# EAGLE board AlphaNumeric-Display-Driver (EAGLE 5.04)
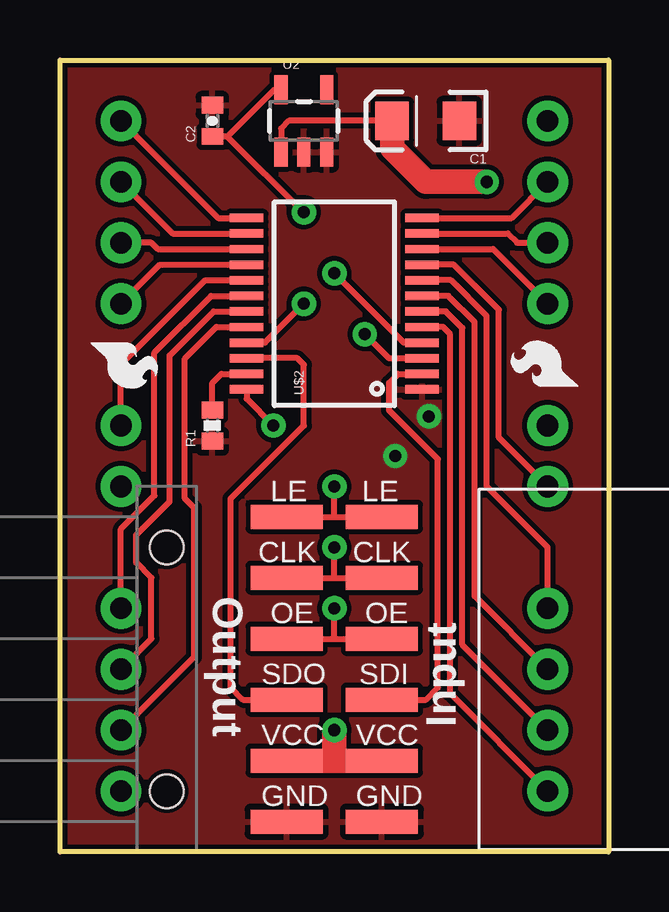
[diagram p0: board, top side]
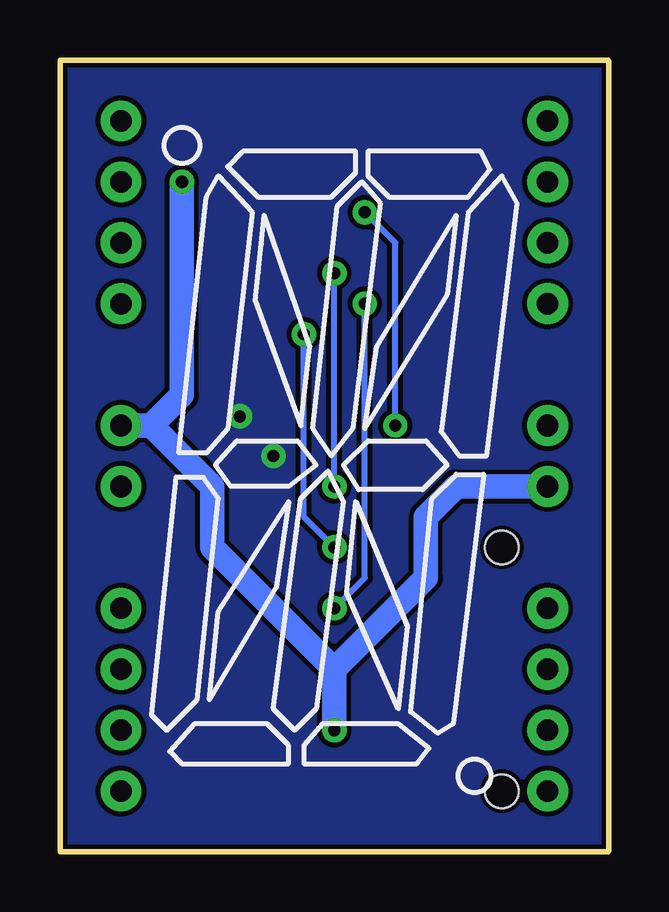
[diagram p1: board, bottom side, seen from below]

Size 22.86 x 33.02 mm. Coordinates in mm from the lower left corner, seen from the top.
Outline: 0,0 0,33.02 22.86,33.02 22.86,0 0,0
Copper layers (1*16): Top 0.035mm / dielectric 1.5mm / Bottom 0.035mm
Design rules "SparkFun": minimum track width 8mil, minimum drill 20mil, track to track 8mil, track to pad 8mil, pad to pad 8mil, via to via 8mil, smd to smd 8mil, copper to edge 8mil, drill to drill 8mil, minimum pad ring 12mil, minimum via ring 10mil, stop-mask expansion 4mil, vias tented up to drill 20mil, thermal gap 10mil

## Footprints (pad centres in the part's own frame; a part is rotated, then mirrored left to right if it is on the bottom)
EIA3216 = smd 1.4 x 1.6: A 1.4,0; C -1.4,0
0402-CAP = smd 0.7 x 0.9: 1 -0.65,0; 2 0.65,0
1X06-SMD = smd 1 x 3: 1 -6.35,5; 2 -3.81,5; 3 -1.27,5; 4 1.27,5; 5 3.81,5; 6 6.35,5 | hole 1.4: -5.08,0; 5.08,0
1X06-SMD-FEMALE-V2 = smd 1 x 3: 1 6.35,4.5; 2 3.81,4.5; 3 1.27,4.5; 4 -1.27,4.5; 5 -3.81,4.5; 6 -6.35,4.5
0402-RES = smd 0.7 x 0.9: 1 -0.65,0; 2 0.65,0
ALPHANUMERIC = drill 0.9 pad 1.7 round: 1 -8.89,13.97; 2 -8.89,11.43; 3 -8.89,8.89; 4 -8.89,6.35; 6 -8.89,1.27; 7 -8.89,-1.27; 9 -8.89,-6.35; 10 -8.89,-8.89; 11 -8.89,-11.43; 12 -8.89,-13.97; 13 8.89,-13.97; 14 8.89,-11.43; 15 8.89,-8.89; 16 8.89,-6.35; 18 8.89,-1.27; 19 8.89,1.27; 21 8.89,6.35; 22 8.89,8.89; 23 8.89,11.43; 24 8.89,13.97
SOT23-5 = smd 0.55 x 1.2: 1 -0.95,-1.3; 2 0,-1.3; 3 0.95,-1.3; 4 0.95,1.3; 5 -0.95,1.3
SSOP24 = smd 0.348 x 1.397: 1 -3.575,-3.656; 2 -2.925,-3.656; 3 -2.275,-3.656; 4 -1.625,-3.656; 5 -0.975,-3.656; 6 -0.325,-3.656; 7 0.325,-3.656; 8 0.975,-3.656; 9 1.625,-3.656; 10 2.275,-3.656; 11 2.925,-3.656; 12 3.575,-3.656; 13 3.575,3.656; 14 2.925,3.656; 15 2.275,3.656; 16 1.625,3.656; 17 0.975,3.656; 18 0.325,3.656; 19 -0.325,3.656; 20 -0.975,3.656; 21 -1.625,3.656; 22 -2.275,3.656; 23 -2.925,3.656; 24 -3.575,3.656

## Placement (x,y rotation side)
C1  10uF  [EIA3216]  15.24,30.48 180 top
C2  0.1uF  [0402-CAP]  6.35,30.48 90 top
JP1  LOGO-SFESK  [SFE-LOGO-FLAME]  1.27,21.21 270 top
JP2  [1X06-SMD]  4.45,7.62 270 top
JP3  [1X06-SMD-FEMALE-V2]  17.91,7.62 90 top
JP5  LOGO-SFESK  [SFE-LOGO-FLAME]  21.59,19.43 90 top
R1  [0402-RES]  6.35,17.78 90 top
U1  ALPHANUMERICPTH  [ALPHANUMERIC]  11.43,16.51 0 bottom
U2  V_REG_LDOSMD  [SOT23-5]  10.16,30.48 0 top
U$2  STP16CP05/A6282-SSOP24  [SSOP24]  11.43,22.86 90 top

## Library data of the parts
C1 C2 JP1-JP3 JP5 R1 U1 U2 U$2 = SparkFun

## Nets
3.3V: C2.1 U2.5 U$2.24
A1: U1.2 U$2.12
A2: U1.22 U$2.15
B: U1.21 U$2.16
C: U1.16 U$2.18
CLK: JP2.2 JP3.2 U$2.3
D1: U1.10 U$2.7
D2: U1.14 U$2.20
E: U1.9 U$2.8
F: U1.4 U$2.10
G1: U1.7 U$2.9
G2: U1.19 U$2.17
GND: C1.C C2.2 JP2.6 JP3.6 R1.1 U2.2 U2.3 U$2.1
H: U1.3 U$2.11
J: U1.24 U$2.13
K: U1.23 U$2.14
L: U1.15 U$2.19
LE: JP2.1 JP3.1 U$2.4
M: U1.12 U$2.5
N: U1.11 U$2.6
OE: JP2.3 JP3.3 U$2.21
REXT: R1.2 U$2.23
SDI: JP3.4 U$2.2
SDO: JP2.4 U$2.22
VCC: C1.A JP2.5 JP3.5 U1.6 U1.18 U2.1

## Tracks (layer width: path | path; a pad name or v marks a point on that pad's centre or on a via)
3.3V  (via drill 0.51)
  Top 0.254: 6.97,29.83 C2.1 | U2.5 8.92,31.78 6.97,29.83 | v10.16,26.67 10.13,26.67 6.97,29.83 | U$2.24 7.77,18.9 v8.89,17.78
  Bottom 0.254: v10.16,26.67 8.89,25.4 v8.89,17.78
A1
  Top 0.254: U$2.12 18.82,26.43 U1.2
A2
  Top 0.254: U$2.15 4.08,25.14 3.81,25.4 U1.22
B
  Top 0.254: U$2.16 4.17,24.48 U1.21
C
  Top 0.254: U$2.18 6.29,23.18 3.94,20.83 3.94,14.86 2.54,13.46 U1.16
CLK  (via drill 0.51)
  Top 0.254: U$2.3 13.71,20.59 v12.7,21.59 | 11.43,11.43 v11.43,12.7 | 11.43,11.43 JP3.2 | JP2.2 11.43,11.43
  Bottom 0.254: v12.7,21.59 12.7,13.97 v11.43,12.7
D1
  Top 0.254: U$2.7 16.18,23.18 17.27,22.1 17.27,10.67 U1.10
D2
  Top 0.254: U$2.20 6.52,21.89 5.21,20.57 5.21,14.73 5.59,14.35 5.59,8.13 U1.14
E
  Top 0.254: U$2.8 16.3,23.84 17.78,22.35 17.78,15.24 20.32,12.7 U1.9
F
  Top 0.254: U$2.10 18.05,25.14 U1.4
G1
  Top 0.254: U1.7 18.29,17.27 18.29,22.61 16.41,24.48 U$2.9
G2
  Top 0.254: U$2.17 6.05,23.84 2.54,20.32 U1.19
GND  (via drill 0.51)
  other vias: 13.97,16.51 15.37,18.16
  pour Bottom: 0,33.02 0,0 22.86,0 22.86,33.02
  pour Top: 0,33.02 0,0 22.86,0 22.86,33.02
H
  Top 0.254: U$2.11 18.66,25.79 19.05,25.4 U1.3
J
  Top 0.254: U$2.13 6.58,26.43 U1.24
K
  Top 0.254: U$2.14 4.7,25.79 U1.23
L
  Top 0.254: U$2.19 6.41,22.54 4.57,20.7 4.57,14.61 3.17,13.21 3.17,12.06 3.81,11.43 3.81,8.89 U1.15
LE  (via drill 0.51)
  Top 0.254: U$2.4 14.32,21.23 v11.43,24.13 | 11.43,13.97 v11.43,15.24 | JP2.1 11.43,13.97 | 11.43,13.97 JP3.1
  Bottom 0.254: v11.43,15.24 v11.43,24.13
M
  Top 0.254: U$2.5 15.96,21.89 16.26,21.59 16.26,6.6 U1.12
N
  Top 0.254: U$2.6 16.07,22.54 16.76,21.84 16.76,8.64 U1.11
OE  (via drill 0.51)
  Top 0.254: U$2.21 8.54,21.23 v10.16,22.86 | 11.43,8.89 v11.43,10.16 | JP2.3 11.43,8.89 | 11.43,8.89 JP3.3
  Bottom 0.254: v10.16,22.86 10.16,11.43 v11.43,10.16
REXT
  Top 0.254: U$2.23 6.73,19.93 6.35,19.56 R1.2
SDI
  Top 0.254: U$2.2 14.09,19.93 13.72,19.56 13.72,18.41 15.75,16.38 15.75,6.86 15.24,6.35 JP3.4
SDO
  Top 0.254: U$2.22 9.89,20.59 10.16,20.32 10.16,17.78 7.11,14.73 7.11,6.86 7.62,6.35 JP2.4
VCC  (via drill 0.51)
  Top 0.254: U2.1 9.21,30.16 9.53,30.48 C1.A
  Top 1.016: JP2.5 11.43,3.81 | 11.43,3.81 JP3.5 | 11.43,3.81 v11.43,5.08 | v17.78,27.94 15.24,27.94 13.84,29.34 C1.A
  Bottom 1.016: v11.43,5.08 11.43,7.62 | 11.43,7.62 7.62,11.43 7.62,13.97 6.35,15.24 U1.18 | 19.05,17.78 U1.6 | 19.05,17.78 16.51,15.24 16.51,12.7 11.43,7.62 | v17.78,27.94 17.78,19.05 19.05,17.78

## Text on the board
tPlace: LE | LE | CLK | CLK | Output | OE | OE | SDO | SDI | Input | VCC | VCC | GND | GND